# Altium PCB PCB robot V2.PCBDOC
Units mm, origin at the board's own origin, x right, y up, seen from the top; angles counter-clockwise.
Board outline 299.72 x 199.9 mm, 2 copper layers (Top Layer, Bottom Layer); 151 components, 120 nets, 545 pads, 15 vias.
Unrouted connection lines stored in the file: 272.
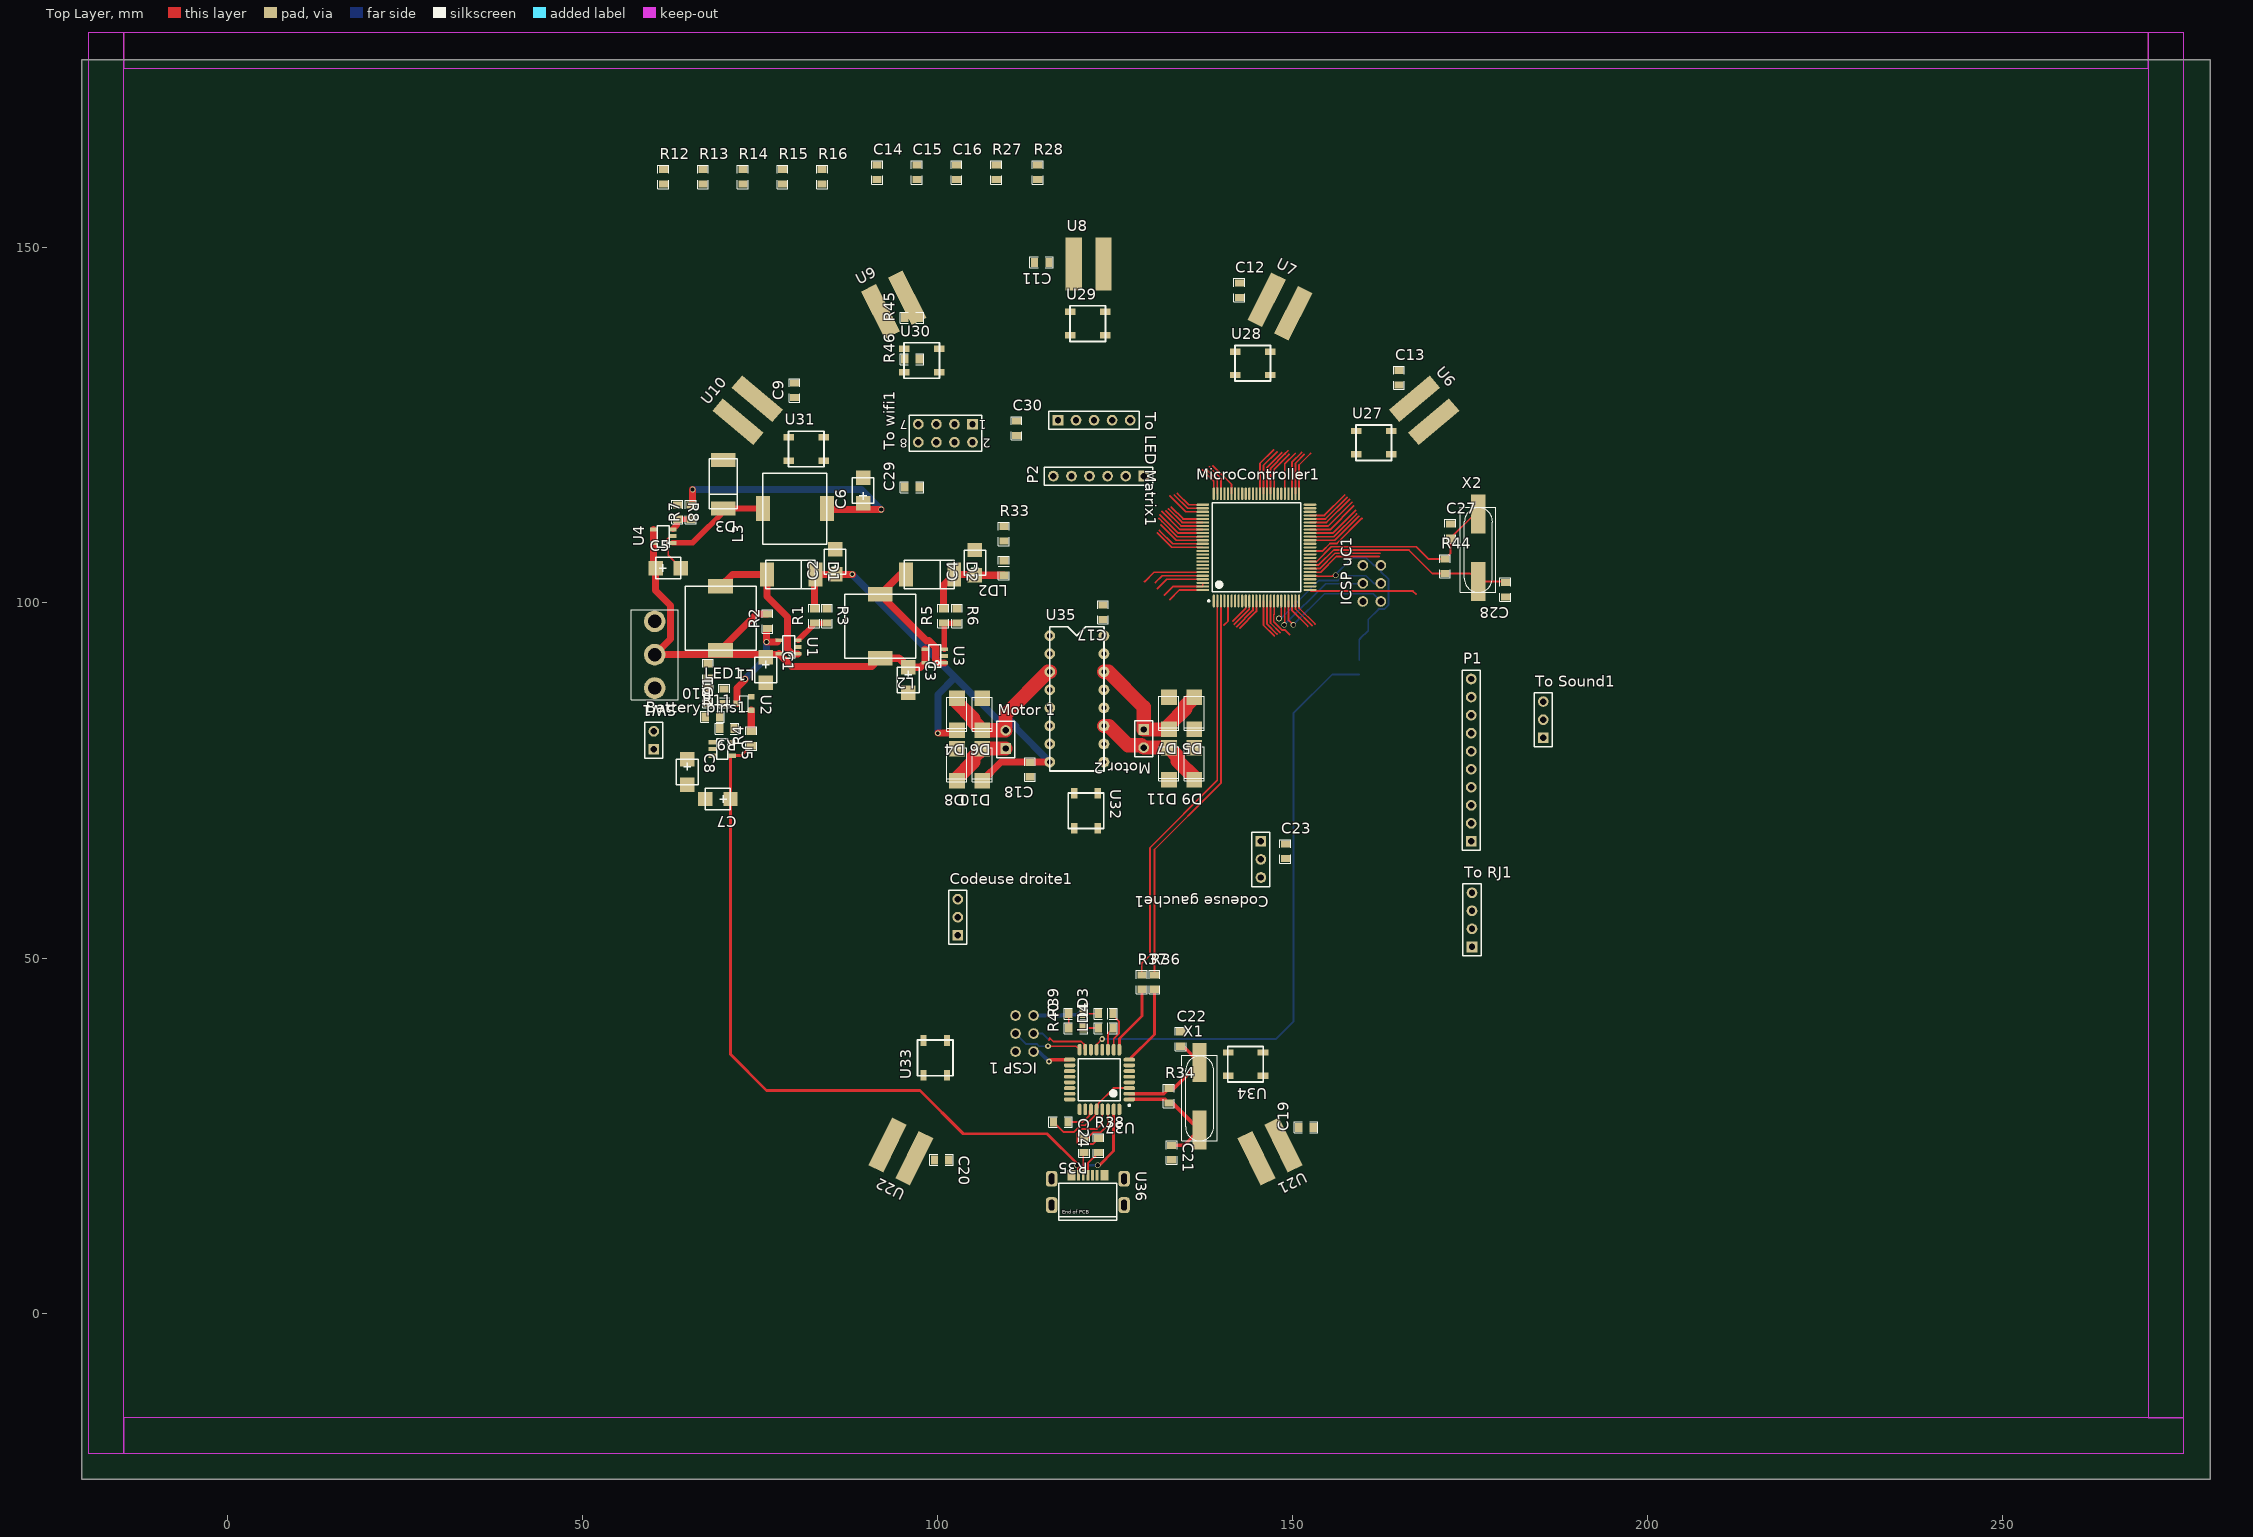
[diagram p0: Top Layer view]
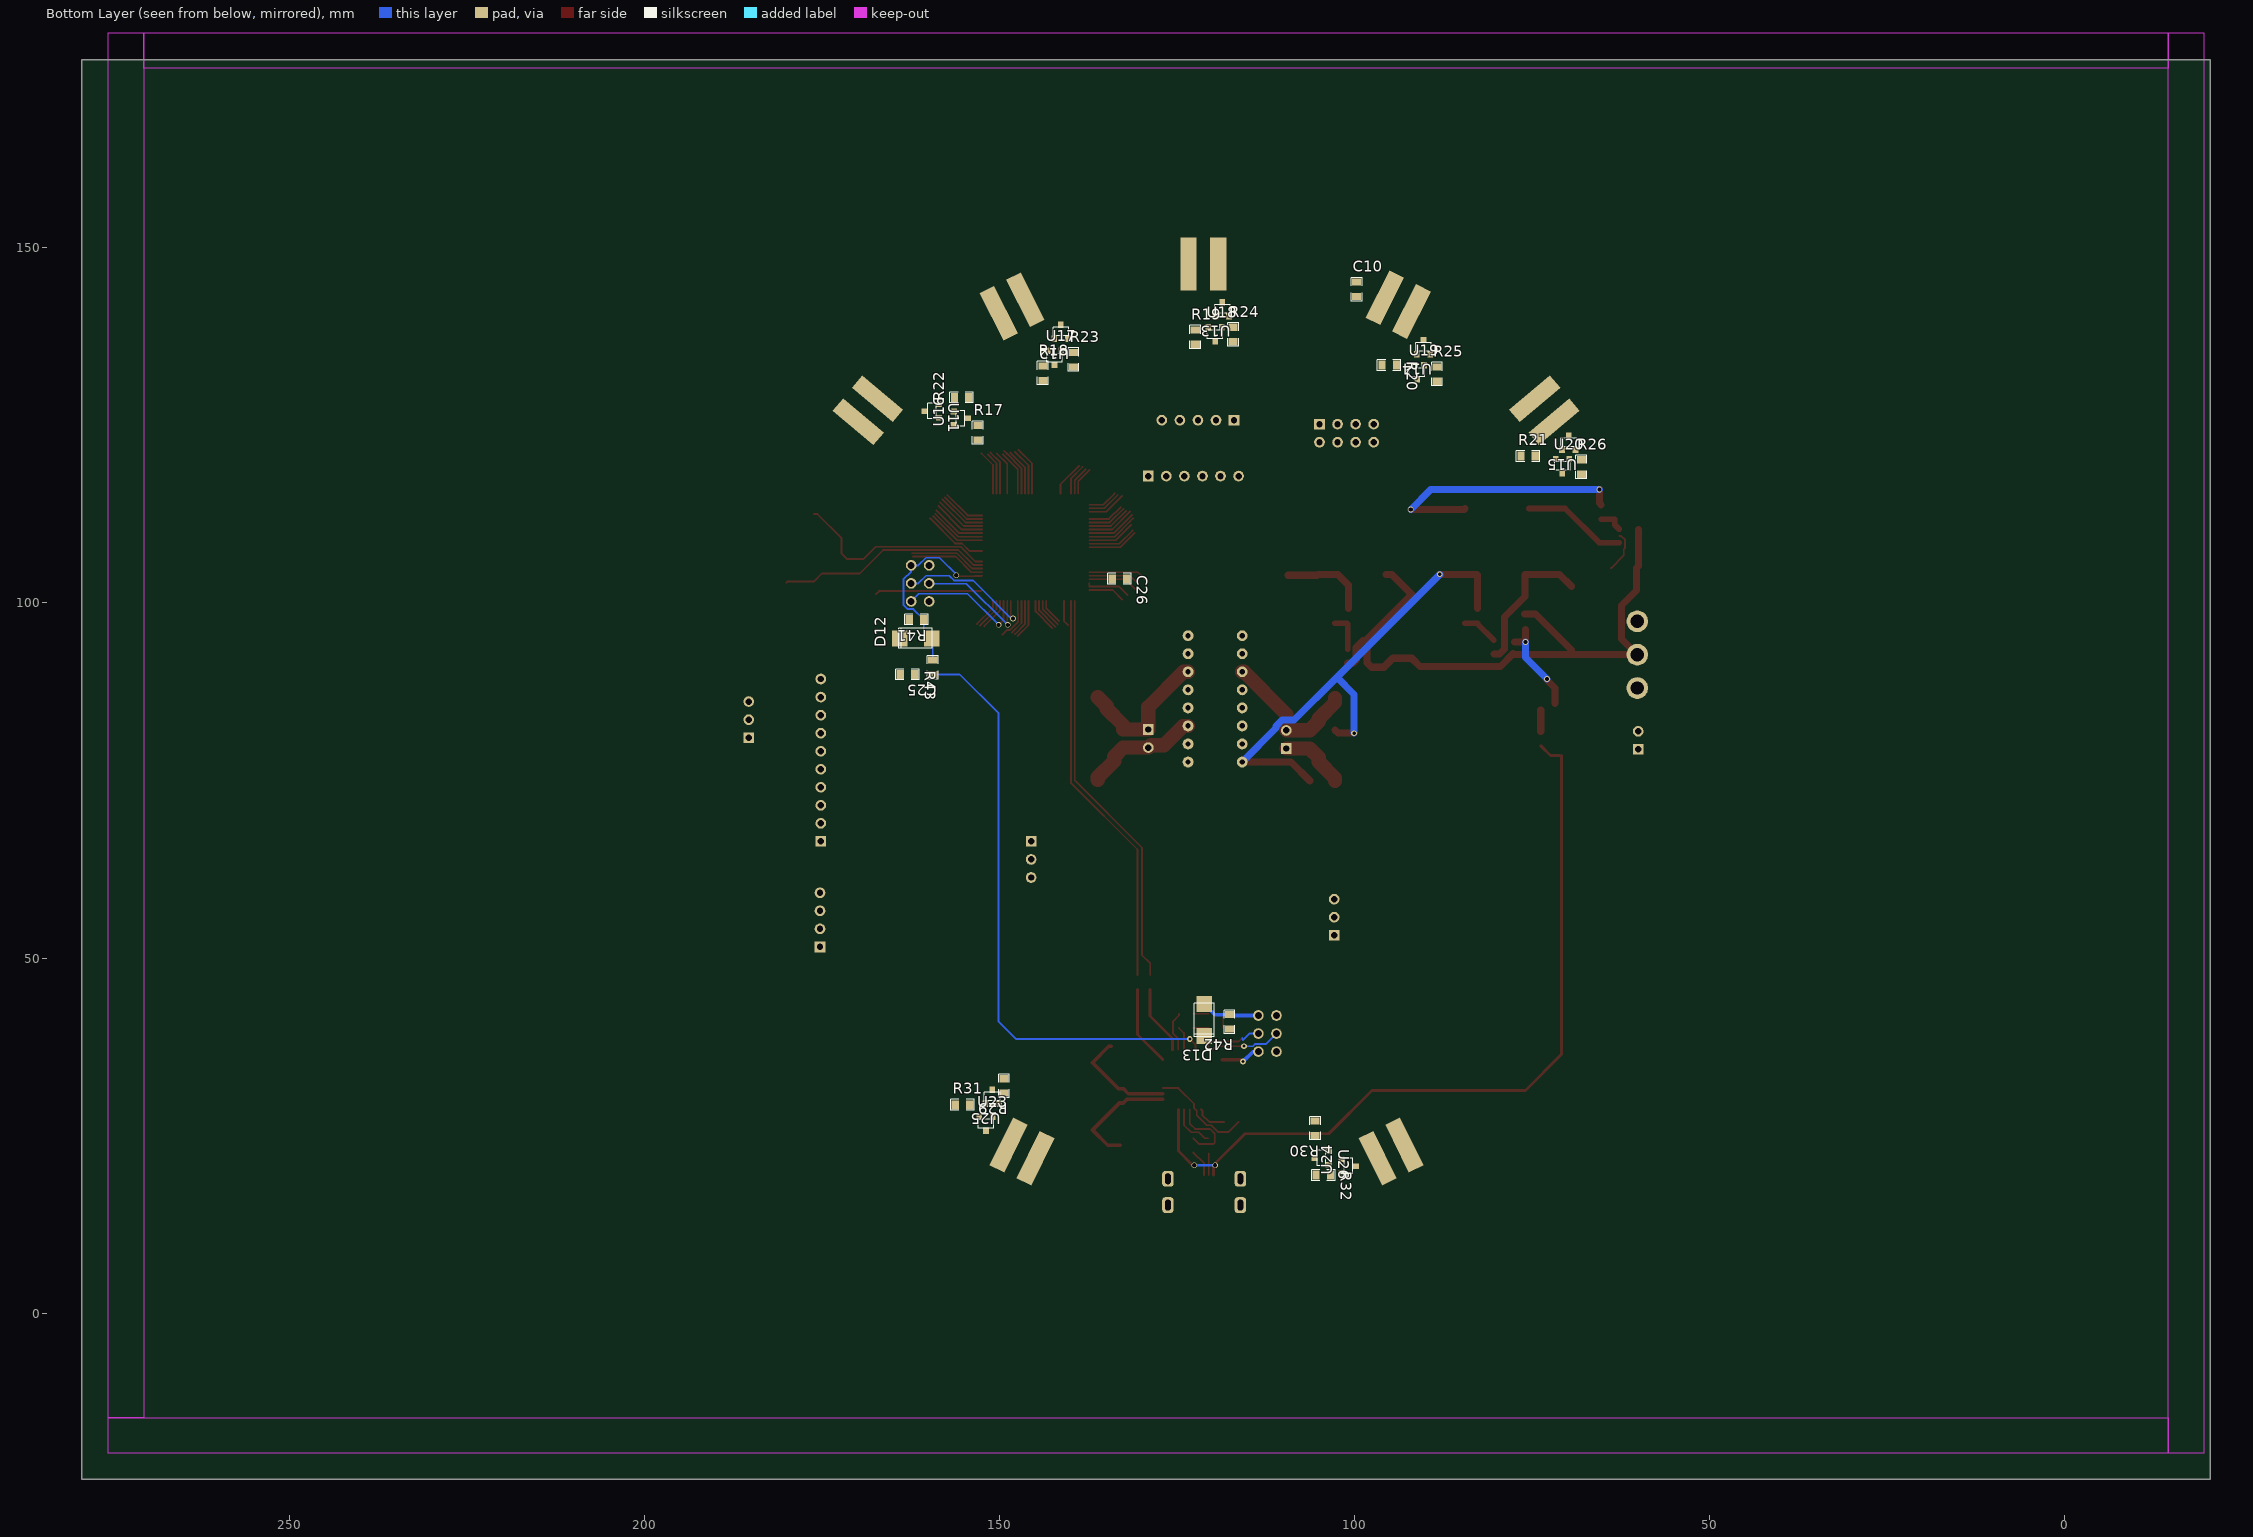
[diagram p1: Bottom Layer view, seen from below]

## Layer stack, top to bottom
Top Solder: solder mask 0.0102, Solder Resist, Dk 3.5
Top Layer: signal copper 0.0356
Dielectric1: dielectric 0.32, FR-4, Dk 4.8
Bottom Layer: signal copper 0.0356
Bottom Solder: solder mask 0.0102, Solder Resist, Dk 3.5

## Board outline
-20.497,-23.403 279.223,-23.403 279.223,176.495 -20.497,176.495

## Design rules (kind name [scope] priority, off if disabled: settings)
Clearance Clearance_bottom_polygon [OnLayer('Bottom Layer') Or OnLayer('Multi-Layer') vs OnLayer('Bottom Layer')  And  InPoly] p1: gap=0.508
Clearance Clearance_top_polygon [OnLayer('Top Layer')  Or OnLayer('Multi-Layer') vs OnLayer('Top Layer') And InPoly] p2: gap=0.508
Clearance Clearance_bottom [OnLayer('Bottom Layer') Or OnLayer('Multi-Layer') vs OnLayer('Bottom Layer')  And Not InPoly] p3: gap=0.203
Clearance Clearance_top [OnLayer('Top Layer')  Or OnLayer('Multi-Layer') vs OnLayer('Top Layer') And Not InPoly] p4: gap=0.203
Clearance Clearance_pad_to_pad [OnLayer('Multi-Layer') vs OnLayer('Multi-Layer')] p5: gap=0.254
ComponentClearance ComponentClearance_bottom [OnLayer('Bottom Overlay') vs OnLayer('Bottom Overlay')] p1: gap=0 collisioncheckmode=3 verticalgap=0.254 showdistances=FALSE
ComponentClearance ComponentClearance_top [OnLayer('Top Overlay') vs OnLayer('Top Overlay')] p2: gap=0 collisioncheckmode=3 verticalgap=0.254 showdistances=FALSE
FabricationTestPointUsage TestPointUsage [All] p1: valid=0 allowmultiple=FALSE
FabricationTestpoint Testpoint [All] p1: side=3 testpointundercomponent=TRUE minsize=1.016 maxsize=2.54 preferedsize=1.524 minholesize=0 maxholesize=1.016 preferedholesize=0.813 testpointgrid=0.025 allowsidetop=TRUE allowsidebottom=TRUE usegrid=TRUE gridtolerance=0
HoleSize [All] p1: absolutevalues=TRUE maxlimit=25.4 minlimit=0.406 maxpercent=80.000 minpercent=20.000
MinimumAnnularRing [PadXSize_AllLayers = PadYSize_AllLayers] p1: minimumring=0.203
PermittedLayers [All] p1: toplayerpermitted=TRUE bottomlayerpermitted=TRUE
PolygonConnect [All] p1: connectstyle=Relief reliefconductorwidth=0.61 reliefentries=4 polygonreliefangle="90 Angle" airgapwidth=0.254
RoutingVias [All] p1: holewidth=0.406 width=0.813 viastyle="Through Hole" minholewidth=0.4 minwidth=0.8 maxholewidth=0.6 maxwidth=10
SMDToPlane [All] p1: distance=0
SolderMaskExpansion [All] p1: expansion=0.102
ViasUnderSMD [All] p1: allowed=FALSE
Width Width_botom_top [OnLayer('Bottom Layer') or OnLayer('Top Layer')] p1: maxlimit=254 minlimit=0.254 preferedwidth=0.813 minimp=50.000000 maximp=50.000000 favimp=50.000000
25 further rules are at their usual default settings.

## Classes and differential pairs
component class "Wi fi connector": C29 R45 R46 "To wifi1"
component class CarteTxMoteur: C17 C18 "Codeuse droite1" "Codeuse gauche1" D4 D5 D6 D7 D8 D9 D10 D11 "Motor 1" "Motor 2" U35
component class "Schema chargeur USB projet robot": C7 C8 LD1 LED1 R9 R10 R11 U5
component class "Alim sch projet robot": "Battery pins1" C1 C2 C3 C4 C5 C6 D1 D2 D3 L1 L2 L3 R1 R2 R3 R4 R5 R6 R7 R8 "REG 5V" "REG 8V" SW1 U1 U2 U3 U4
component class "CarteTxCapteurDistance 2": Analog C9 C10 C11 C12 C13 C14 C15 C16 Digital infrared1 infrared2 infrared3 infrared4 infrared5 infrared6 LedRgbWs2812b1 LedRgbWs2812b2 LedRgbWs2812b3 LedRgbWs2812b4 LedRgbWs2812b5 LedRgbWs2812b6 LedRgbWs2812b7 LedRgbWs2812b8 LedRgbWs2812b9 LedRgbWs2812b10 Q1 Q2 Q3 Q4 Q5 Q6 Q7 Q8 Q9 Q10 Q11 R12 R13 R14 R15 R16 R17 R18 R19 R20 R21 R22 R23 R24 R25 R26 R27 R28 R29 R30 R31 R32 U6 U7 U8 U9 U10 U11 U12 U13 U14 U15 U16 U17 U18 U19 U20 U21 U22 U23 U24 U25 U26 U27 U28 U29 U30 U31 U32 U33 U34
component class "IA Core": C19 C20 C21 C22 C23 C24 C25 C26 C27 C28 D12 D13 "ICSP 1" "ICSP uC1" LD2 LD3 LD4 MicroController1 R33 R34 R35 R36 R37 R38 R39 R40 R41 R42 R43 R44 U36 U37 X1 X2
component class "LED Matrix connector": "To LED Matrix1"
component class "NXC Connector": "To RJ1"
component class "Sound Connector": "To Sound1"
component class TXRobot-Boutons: ButtonCo1 P1
component class "Line driver connector": C30 P2

## Components (designator, comment, footprint, x,y, rotation, side; value= is the part's Value field where it differs from the comment)
"Battery pins1" "Header 2" HDR1X2 60.071,79.375 r90 top
C1 "CAP_POL" 293D/B 75.819,92.329 r270 top
C2 "CAP_POL" 293D/B 85.598,104.013 r90 top
C3 "CAP_POL" 293D/B 95.885,90.932 r270 top
C4 "CAP_POL" 293D/B 105.283,103.886 r90 top
C5 "CAP_POL" 293D/B 60.325,104.902 r0 top
C6 "CAP_POL" 293D/B 89.535,114.046 r90 top
C7 "CAP_POL" 293D/B 70.866,72.39 r180 top
C8 "CAP_POL" 293D/B 64.77,77.978 r270 top
C9 "CAP" 0805 79.883,128.905 r90 top
C10 "CAP" 0805 99.695,143.129 r90 bottom
C11 "CAP" 0805 115.697,147.955 r180 top
C12 "CAP" 0805 142.494,143.002 r90 top
C13 "CAP" 0805 164.973,130.683 r90 top
C14 "CAP" 0805 91.517,159.604 r90 top
C15 "CAP" 0805 97.105,159.604 r90 top
C16 "CAP" 0805 102.693,159.604 r90 top
C17 "CAP" 0805 123.317,99.695 r270 top
C18 "CAP" 0805 113.03,77.549 r270 top
C19 "CAP" 0805 152.908,26.162 r180 top
C20 "CAP" 0805 99.568,21.59 r0 top
C21 "CAP" 0805 132.969,23.622 r270 top
C22 "CAP" 0805 134.239,37.592 r90 top
C23 "CAP" 0805 148.971,64.008 r90 top
C24 "CAP" 0805 116.332,26.924 r0 top
C25 "CAP" 0805 159.385,91.948 r270 bottom
C26 "CAP" 0805 134.112,103.378 r180 bottom
C27 "CAP" 0805 172.212,109.093 r90 top
C28 "CAP" 0805 179.959,102.87 r270 top
C29 "CAP" 0805 97.444,116.282 r180 top
C30 "CAP" 0805 111.125,123.571 r90 top
"Codeuse droite1" "Header 3" HDR1X3 102.87,53.213 r90 top
"Codeuse gauche1" "Header 3" HDR1X3 145.542,66.421 r270 top
D1 "SS32" "Schottly Diode SS32 footprint" 82.804,104.013 r270 top
D2 "SS32" "Schottly Diode SS32 footprint" 102.362,104.013 r270 top
D3 "SS32" "Schottly Diode SS32 footprint" 69.85,113.284 r180 top
D4 "DiodeRedresseuse" "Diode MULTICOMP SS16" 102.743,84.328 r270 top
D5 "DiodeRedresseuse" "Diode MULTICOMP SS16" 136.144,84.455 r270 top
D6 "DiodeRedresseuse" "Diode MULTICOMP SS16" 106.299,84.328 r270 top
D7 "DiodeRedresseuse" "Diode MULTICOMP SS16" 132.588,84.455 r270 top
D8 "DiodeRedresseuse" "Diode MULTICOMP SS16" 102.743,77.216 r270 top
D9 "DiodeRedresseuse" "Diode MULTICOMP SS16" 136.144,77.343 r270 top
D10 "DiodeRedresseuse" "Diode MULTICOMP SS16" 106.299,77.216 r270 top
D11 "DiodeRedresseuse" "Diode MULTICOMP SS16" 132.588,77.343 r270 top
D12 "DiodeRedresseuse" "Diode MULTICOMP SS16" 161.798,94.996 r0 bottom
D13 "DiodeRedresseuse" "Diode MULTICOMP SS16" 121.158,41.275 r270 bottom
"ICSP 1" "ISCP Arduino" "Prog Arduino" 113.538,36.83 r180 top
"ICSP uC1" "ISCP Arduino" "Prog Arduino" 162.433,100.203 r180 top
L1 "56uH" 1050 69.469,93.345 r180 top
L2 "56uH" 1050 91.948,92.202 r180 top
L3 "56uH" 1050 75.438,113.284 r90 top
LD1 "comment" LED0805 69.977,85.852 r90 top
LD2 "Yellow" LED0805 109.347,105.918 r270 top
LD3 "Yellow" LED0805 124.714,42.164 r180 top
LD4 "Yellow" LED0805 124.714,40.132 r180 top
LED1 "comment" LED0805 67.691,85.852 r90 top
MicroController1 "ATmega2560-16AU" 100A_N 144.907,107.823 r90 top
"Motor 1" "Header 2" HDR1X2 109.601,79.502 r90 top
"Motor 2" "Header 2" HDR1X2 129.032,82.169 r270 top
P1 "Header 10" HDR1X10 175.133,66.421 r90 top
P2 "Header 6" HDR1X6 129.032,117.856 r180 top
R1 "RES" 0805 82.677,97.155 r90 top
R2 "RES" 0805 76.073,96.393 r90 top
R3 "RES" 0805 84.455,99.187 r270 top
R4 "RES" 0805 73.787,79.883 r90 top
R5 "RES" 0805 100.838,97.155 r90 top
R6 "RES" 0805 102.743,99.187 r270 top
R7 "RES" 0805 65.278,111.76 r90 top
R8 "RES" 0805 63.373,113.792 r270 top
R9 "RES" 0805 71.374,82.296 r180 top
R10 "RES" 0805 67.691,91.44 r270 top
R11 "RES" 0805 67.31,83.947 r0 top
R12 "RES" 0805 61.418,158.969 r90 top
R13 "RES" 0805 67.006,158.969 r90 top
R14 "RES" 0805 72.594,158.969 r90 top
R15 "RES" 0805 78.182,158.969 r90 top
R16 "RES" 0805 83.77,158.969 r90 top
R17 "RES" 0805 153.035,122.936 r90 bottom
R18 "RES" 0805 143.891,131.318 r90 bottom
R19 "RES" 0805 122.428,136.398 r90 bottom
R20 "RES" 0805 96.139,133.477 r180 bottom
R21 "RES" 0805 76.581,120.65 r180 bottom
R22 "RES" 0805 154.305,128.905 r0 bottom
R23 "RES" 0805 139.573,133.223 r90 bottom
R24 "RES" 0805 117.094,136.779 r90 bottom
R25 "RES" 0805 88.392,131.191 r90 bottom
R26 "RES" 0805 68.072,118.11 r90 bottom
R27 "RES" 0805 108.281,159.604 r90 top
R28 "RES" 0805 114.123,159.604 r90 top
R29 "RES" 0805 149.352,33.02 r270 bottom
R30 "RES" 0805 105.537,27.051 r270 bottom
R31 "RES" 0805 156.21,29.337 r180 bottom
R32 "RES" 0805 105.41,19.431 r180 bottom
R33 "RES" 0805 109.347,108.712 r90 top
R34 "RES" 0805 132.588,29.591 r90 top
R35 "RES" 0805 120.65,24.638 r270 top
R36 "RES" 0805 130.556,45.593 r90 top
R37 "RES" 0805 128.778,45.593 r90 top
R38 "RES" 0805 122.682,22.606 r90 top
R39 "RES" 0805 120.523,42.164 r180 top
R40 "RES" 0805 120.523,40.132 r180 top
R41 "RES" 0805 160.655,97.663 r0 bottom
R42 "RES" 0805 117.602,42.037 r270 bottom
R43 "RES" 0805 163.957,89.916 r180 bottom
R44 "RES" 0805 171.45,104.14 r90 top
R45 "RES" 0805 97.444,140.158 r180 top
R46 "RES" 0805 97.444,134.316 r180 top
SW1 "SW_SPDT" RS734-7292 60.198,92.71 r180 top
"To LED Matrix1" "Header 5" HDR1X5 116.967,125.73 r0 top
"To RJ1" "Header 4" HDR1X4 175.26,51.562 r90 top
"To Sound1" "Header 3" HDR1X3 185.293,81.026 r90 top
"To wifi1" "Header 4X2" HDR2X4 104.937,125.172 r180 top
U1 "LM2731" "LM2731 footprint" 80.391,92.837 r270 top
U2 "Transistors" BC817-40 72.771,85.852 r270 top
U3 "LM2731" "LM2731 footprint" 100.965,91.567 r270 top
U4 "LMR10510XMF" "LMR10510 footprint" 62.738,108.458 r90 top
U5 "MCP73831" MCP73831 68.326,80.391 r270 top
U6 "infrared" Infrared 168.529,127.127 r310 top
U7 "infrared" Infrared 148.209,141.732 r333 top
U8 "infrared" Infrared 121.285,147.701 r0 top
U9 "infrared" Infrared 93.853,141.986 r27 top
U10 "infrared" Infrared 73.279,127.127 r50 top
U11 "Transistors" BC817-40 159.512,127 r270 bottom
U12 "Transistors" BC817-40 141.351,138.176 r0 bottom
U13 "Transistors" BC817-40 118.618,141.351 r0 bottom
U14 "Transistors" BC817-40 90.297,136.017 r0 bottom
U15 "Transistors" BC817-40 69.85,122.555 r0 bottom
U16 "Transistors" BC817-40 155.448,125.984 r90 bottom
U17 "Transistors" BC817-40 142.24,134.493 r180 bottom
U18 "Transistors" BC817-40 119.634,137.795 r180 bottom
U19 "Transistors" BC817-40 91.186,132.461 r180 bottom
U20 "Transistors" BC817-40 70.739,119.253 r180 bottom
U21 "infrared" Infrared 146.812,22.733 r206 top
U22 "infrared" Infrared 94.869,22.733 r154 top
U23 "Transistors" BC817-40 151.892,26.67 r180 bottom
U24 "Transistors" BC817-40 100.838,20.701 r90 bottom
U25 "Transistors" BC817-40 151.003,30.48 r0 bottom
U26 "Transistors" BC817-40 104.648,21.844 r270 bottom
U27 "LedRgbWs2812b" LedRgbWs2812b 161.417,122.555 r0 top
U28 "LedRgbWs2812b" LedRgbWs2812b 144.399,133.731 r0 top
U29 "LedRgbWs2812b" LedRgbWs2812b 121.158,139.319 r0 top
U30 "LedRgbWs2812b" LedRgbWs2812b 97.79,134.112 r0 top
U31 "LedRgbWs2812b" LedRgbWs2812b 81.534,121.666 r0 top
U32 "LedRgbWs2812b" LedRgbWs2812b 120.904,70.739 r270 top
U33 "LedRgbWs2812b" LedRgbWs2812b 99.695,35.941 r90 top
U34 "LedRgbWs2812b" LedRgbWs2812b 143.383,35.052 r180 top
U35 "L293NE" L293NE 123.444,95.377 r0 top
U36 "USB microB" "USB micro B connector" 116.078,18.923 r0 top
U37 "ATmega16U2-AU" 32A_N 122.809,32.893 r180 top
X1 "16MHz" HC-49S-SMD 136.906,25.781 r90 top
X2 "16MHz" HC-49S-SMD 176.149,102.997 r90 top

## Footprints (in the part's own frame and the unit in brackets; to place one, negate y for a bottom-side part, rotate by r counter-clockwise, add the part's x,y. Pads: shape width x height; smd on the part's side, far side on the other; paste and mask are expansions set on the pad)
32A_N [mm] "Thin QFP, 32-Leads, Body 7x7mm, Pitch 0.8mm, IPC Medium Density"
  oval 1.65x0.55 smd: 1(-4.2,2.8) 2(-4.2,2) 3(-4.2,1.2) 4(-4.2,0.4) 5(-4.2,-0.4) 6(-4.2,-1.2) 7(-4.2,-2) 8(-4.2,-2.8) 17(4.2,-2.8) 18(4.2,-2) 19(4.2,-1.2) 20(4.2,-0.4) 21(4.2,0.4) 22(4.2,1.2) 23(4.2,2) 24(4.2,2.8)
  oval 0.55x1.65 smd: 9(-2.8,-4.2) 10(-2,-4.2) 11(-1.2,-4.2) 12(-0.4,-4.2) 13(0.4,-4.2) 14(1.2,-4.2) 15(2,-4.2) 16(2.8,-4.2) 25(2.8,4.2) 26(2,4.2) 27(1.2,4.2) 28(0.4,4.2) 29(-0.4,4.2) 30(-1.2,4.2) 31(-2,4.2) 32(-2.8,4.2)
  silkscreen extent -4.33,-2.95 2.95,3.75, body extent -3.5,-3.5 3.5,3.5, height 1.2
100A_N [mm] "Thin QFP, 100-Leads, Body 14x14mm, Pitch 0.5mm, IPC Medium Density"
  oval 1.8x0.3 smd: 1(-7.55,6) 2(-7.55,5.5) 3(-7.55,5) 4(-7.55,4.5) 5(-7.55,4) 6(-7.55,3.5) 7(-7.55,3) 8(-7.55,2.5) 9(-7.55,2) 10(-7.55,1.5) 11(-7.55,1) 12(-7.55,0.5) 13(-7.55,0) 14(-7.55,-0.5) 15(-7.55,-1) 16(-7.55,-1.5) 17(-7.55,-2) 18(-7.55,-2.5) 19(-7.55,-3) 20(-7.55,-3.5) 21(-7.55,-4) 22(-7.55,-4.5) 23(-7.55,-5) 24(-7.55,-5.5) 25(-7.55,-6) 51(7.55,-6) 52(7.55,-5.5) 53(7.55,-5) 54(7.55,-4.5) 55(7.55,-4) 56(7.55,-3.5) 57(7.55,-3) 58(7.55,-2.5) 59(7.55,-2) 60(7.55,-1.5) 61(7.55,-1) 62(7.55,-0.5) 63(7.55,0) 64(7.55,0.5) 65(7.55,1) 66(7.55,1.5) 67(7.55,2) 68(7.55,2.5) 69(7.55,3) 70(7.55,3.5) 71(7.55,4) 72(7.55,4.5) 73(7.55,5) 74(7.55,5.5) 75(7.55,6)
  oval 0.3x1.8 smd: 26(-6,-7.55) 27(-5.5,-7.55) 28(-5,-7.55) 29(-4.5,-7.55) 30(-4,-7.55) 31(-3.5,-7.55) 32(-3,-7.55) 33(-2.5,-7.55) 34(-2,-7.55) 35(-1.5,-7.55) 36(-1,-7.55) 37(-0.5,-7.55) 38(0,-7.55) 39(0.5,-7.55) 40(1,-7.55) 41(1.5,-7.55) 42(2,-7.55) 43(2.5,-7.55) 44(3,-7.55) 45(3.5,-7.55) 46(4,-7.55) 47(4.5,-7.55) 48(5,-7.55) 49(5.5,-7.55) 50(6,-7.55) 76(6,7.55) 77(5.5,7.55) 78(5,7.55) 79(4.5,7.55) 80(4,7.55) 81(3.5,7.55) 82(3,7.55) 83(2.5,7.55) 84(2,7.55) 85(1.5,7.55) 86(1,7.55) 87(0.5,7.55) 88(0,7.55) 89(-0.5,7.55) 90(-1,7.55) 91(-1.5,7.55) 92(-2,7.55) 93(-2.5,7.55) 94(-3,7.55) 95(-3.5,7.55) 96(-4,7.55) 97(-4.5,7.55) 98(-5,7.55) 99(-5.5,7.55) 100(-6,7.55)
  silkscreen extent -7.67,-6.25 6.25,6.82, body extent -7,-7 7,7, height 1.2
293D/B [mil]
  rect 80x80 smd: 1(0,0) 2(140,0)
  silkscreen extent 0,-60 140,60
0805 [mil]
  rect 40x50 smd: 1(0,0) 2(80,0)
  silkscreen extent -25,-30 105,30
1050 [mm]
  rect 3.5x2 smd paste+0 mask+1: 1(0,0) 2(0,-9)
  silkscreen extent -5,-9 5,0
BC817-40 [mm]
  rect 0.8x0.9 smd: 1(0.95,1) 2(-0.95,1) 3(0,-1)
  silkscreen extent -1.1,-0.6 1.1,0.6
"Diode MULTICOMP SS16" [mm]
  rect 2.2x2.21 smd: 1(-2.25,0) 2(2.25,0)
  silkscreen extent -2.38,-1.4 2.38,1.4
HC-49S-SMD [mm] "SMD quartz crystal"
  rect 5.5x2 smd: 1(0,0) 2(9.5,0)
  silkscreen extent -1.5,-2.48 10.5,2.52
HDR1X2 [mm] "Connector; Header; 2 Position"
  rect 1.5x1.5 hole 0.9: 1(0,0)
  round 1.5 hole 0.9: 2(2.54,0)
  silkscreen extent -1.27,-1.27 3.81,1.27
HDR1X3 [mm] "Connector; Header; 3 Position"
  rect 1.5x1.5 hole 0.9: 1(0,0)
  round 1.5 hole 0.9: 2(2.54,0) 3(5.08,0)
  silkscreen extent -1.27,-1.27 6.35,1.27
HDR1X4 [mm] "Connector; Header; 4 Position"
  rect 1.5x1.5 hole 0.9: 1(0,0)
  round 1.5 hole 0.9: 2(2.54,0) 3(5.08,0) 4(7.62,0)
  silkscreen extent -1.27,-1.27 8.89,1.27
HDR1X5 [mm] "Connector; Header; 5 Position"
  rect 1.5x1.5 hole 0.9: 1(0,0)
  round 1.5 hole 0.9: 2(2.54,0) 3(5.08,0) 4(7.62,0) 5(10.16,0)
  silkscreen extent -1.27,-1.27 11.43,1.27
HDR1X6 [mm] "Connector; Header; 6 Position"
  rect 1.5x1.5 hole 0.9: 1(0,0)
  round 1.5 hole 0.9: 2(2.54,0) 3(5.08,0) 4(7.62,0) 5(10.16,0) 6(12.7,0)
  silkscreen extent -1.27,-1.27 13.97,1.27
HDR1X10 [mm] "Connector; Header; 10 Position"
  rect 1.5x1.5 hole 0.9: 1(0,0)
  round 1.5 hole 0.9: 2(2.54,0) 3(5.08,0) 4(7.62,0) 5(10.16,0) 6(12.7,0) 7(15.24,0) 8(17.78,0) 9(20.32,0) 10(22.86,0)
  silkscreen extent -1.27,-1.27 24.13,1.27
HDR2X4 [mm] "Connector; Header; 4x2 Position"
  rect 1.5x1.5 hole 0.9: 1(0,0)
  round 1.5 hole 0.9: 2(0,2.54) 3(2.54,0) 4(2.54,2.54) 5(5.08,0) 6(5.08,2.54) 7(7.62,0) 8(7.62,2.54)
  silkscreen extent -1.27,-1.27 8.89,3.81
Infrared [mm]
  rect 2.3x7.5 smd far side: gndEmitter(-2.1,0) VCC(2.1,0)
  rect 2.3x7.5 smd: gndReceiver(2.1,0) VCC(-2.1,0)
L293NE [mil]
  round 60 hole 30: 1(-300,0) 2(-300,-100) 3(-300,-200) 4(-300,-300) 5(-300,-400) 6(-300,-500) 7(-300,-600) 8(-300,-700) 9(0,0) 10(0,-100) 11(0,-200) 12(0,-300) 13(0,-400) 14(0,-500) 15(0,-600) 16(0,-700)
  silkscreen extent -300,-750 0,50
LED0805 [mil]
  rect 40x50 smd: A(80,0) K(0,0)
  silkscreen extent -25,-30 105,30
LedRgbWs2812b [mm]
  rect 1.5x0.9 smd: din(2.45,1.65) dout(-2.45,-1.65) GND(2.45,-1.65) VCC(-2.45,1.65)
  silkscreen extent -2.5,-2.5 2.5,2.5
"LM2731 footprint" [mm]
  rect 0.55x1 smd paste+0 mask+0.05: 1(0,0) 2(-0.95,0) 3(-1.9,0) 4(-1.9,-2.7) 5(0,-2.7)
  silkscreen extent -2.54,-2.16 0.64,-0.51
"LMR10510 footprint" [mm]
  rect 0.55x1 smd paste+0 mask+0.05: 1(0,0) 2(0.95,0) 3(1.9,0) 4(1.9,2.7) 5(0,2.7)
  silkscreen extent -0.64,0.51 2.41,2.16
MCP73831 [mm]
  rect 0.6x1.1 smd paste+0 mask+0.05: 1(0,0) 2(0.95,0) 3(1.9,0) 4(1.9,2.8) 5(0,2.8)
  silkscreen extent -0.51,0.63 2.41,2.16
"Prog Arduino" [mm]
  round 1.5 hole 1 paste+0 mask+0.05: 1(0,0) 2(2.54,0) 3(0,-2.54) 4(2.54,-2.54) 5(0,-5.08) 6(2.54,-5.08)
RS734-7292 [mil]
  round 120 hole 73: 1(0,0) 2(0,185) 3(0,-185)
  silkscreen extent -130,-250 130,250
"Schottly Diode SS32 footprint" [mm]
  rect 3.39x1.96 smd paste+0 mask+0.05: 1(0,0) 2(0,-6.81)
  silkscreen extent -2,-7 2,0
"USB micro B connector" [mm]
  rect 0.4x1.5 smd paste+0 mask+0.05: 1(3.8,0.508) 2(4.45,0.508) 3(5.1,0.508) 4(5.75,0.508) 5(6.4,0.508)
  rrect50% 1.6x2.2 hole 0.8 slot 1.5 at 90 deg paste+0 mask+0.05: 6(0,0) 7(0,-3.7) 8(10.2,-3.7) 9(10.2,0)
  rect 1.15x1.5 smd paste+0 mask+0.05: 10(2.775,0.508) 11(7.425,0.508)
  silkscreen extent 1.02,-5.84 9.14,-0.64

## Part data
"Battery pins1" "Motor 1" "Motor 2": "Header, 2-Pin"
C1 C2 C3 C4 C5 C6 C7 C8: "capacité polarisée"
C9 C10 C11 C12 C13 C14 C15 C16 C17 C18 C19 C20 C21 C22 C23 C24 C25 C26 C27 C28 C29 C30: "capacité non polarisée"
"Codeuse droite1" "Codeuse gauche1" "To Sound1": "Header, 3-Pin"
D1 D2 D3: "Schottky Diode 20V 3A"
"ICSP 1" "ICSP uC1": "Programmation Port For Arduino"
L1 L2 L3: library part "Shielded inductor", "Shielded Inductor 1050"
LD1 LD2 LD3 LD4 LED1: library part LED, "LED 5mm/3mm/CMS"
MicroController1: "8-bit AVR Microcontroller, 4.5-5.5V, 256KB Flash, 4KB EEPROM, 8KB SRAM, 86 GPIO pins, 100-pin TQFP, Industrial Grade (-40°C to 85°C), Pb-Free"
P1: "Header, 10-Pin"
P2: "Header, 6-Pin"
R1 R2 R3 R4 R5 R6 R7 R8 R9 R10 R11 R12 R13 R14 R15 R16 R17 R18 R19 R20 R21 R22 R23 R24 R25 R26 R27 R28 R29 R30 R31 R32 R33 R34 R35 R36 R37 R38 R39 R40 R41 R42 R43 R44 R45 R46: "resistance"
"To LED Matrix1": "Header, 5-Pin"
"To RJ1": "Header, 4-Pin"
"To wifi1": "Header, 4-Pin, Dual row"
U1 U3: "Boost switch regulator DCDC"
U2 U11 U12 U13 U14 U15 U16 U17 U18 U19 U20 U23 U24 U25 U26: "NPN transistor"
U4: "Step down converter"
U5: "Voltage regulator for Li-po or li-ion battery, USB compatible"
U6 U7 U8 U9 U10 U21 U22: library part RPR-359F
U36: "Usb female connector SMD micro B"
U37: "8-bit AVR Microcontroller, 2.7-5.5V, 16KB Flash, 512 Bytes EEPROM, 512 Bytes SRAM, 32-pin TQFP, Industrial Grade (-40°C to 85°C)"
X1 X2: library part XTAL, "Quartz"

## Via types
v1: diameter 0.8, hole 0.6, Top Layer to Bottom Layer, 10 vias
v2: diameter 0.813, hole 0.406, Top Layer to Bottom Layer, 3 vias
v3: diameter 0.8, hole 0.5, Top Layer to Bottom Layer, 2 vias

## Nets (pads, with @x,y where several pads share a name; then routed paths per layer and width w, separated by ;. In a path a pad name is that pad's centre, name@x,y a point inside that pad or via, vN(x,y) a via of type N, cw(c..) or ccw(c..) an arc to the next point about the centre after c; other vN are vias at no path point)
BATTERY: C1.1 C3.1 C5.1 C8.1 L1.1 L2.1 R2.2 SW1.1 U1.5 U3.4 U3.5 U4.4 U4.5 U5.3 | length 70.3
  Top Layer w1: U4.4 U4.5 60.038,105.189 C5.1 60.325,101.736 62.425,99.636 62.425,94.937 SW1.1 77.564,92.71 U1.5 79.469,91.059 90.805,91.059 L2.1 94.615,92.202 C3.1 97.63,90.932 U3.5 U3.4 ; L1.1 74.549,98.425 R2.2
"BATTERY PIN +": "Battery pins1.2" SW1.2
D+: R38.1 U36.3 | length 3.8
  Top Layer w0.254: U36.3 121.178,21.102 R38.1
D-: R35.2 U36.2 | length 3.1
  Top Layer w0.254: U36.2 R35.2@120.528,22.484
DTR: C25.2 R43.2 U37.13 | length 84.7
  Top Layer w0.254: U37.13 122.409,37.827 v2(123.19,38.608)
  Bottom Layer w0.254: v2(123.19,38.608) 147.701,38.608 150.114,41.021 150.114,84.455 155.575,89.916 C25.2
"ENABLE 1": MicroController1.23 U35.1 | length 4.6
  Top Layer w0.254: MicroController1.23 149.907,98.99 152.146,96.751 152.146,96.647
"ENABLE 2": MicroController1.5 U35.16 | length 3.6
  Top Layer w0.254: 140.364,96.901 140.907,97.444 MicroController1.5
GND: "Battery pins1.1" "Codeuse droite1.2" "Codeuse gauche1.2" "ICSP 1.6" "ICSP uC1.6" "To LED Matrix1.2" "To RJ1.1" "To Sound1.1" "To wifi1.2" C1.2 C2.2 C3.2 C4.2 C5.2 C6.2 C7.2 C8.2 C9.2 C10.2 C11.2 C12.2 C13.2 C14.2 C15.2 C16.2 C17.1 C18.2 C19.1 C20.2 C21.2 C22.2 C23.1 C24.1 C26.2 C27.2 C28.2 C29.2 C30.1 D3.2 D6.1 D7.1 D8.1 D9.1 MicroController1.11 MicroController1.32 MicroController1.62 MicroController1.81 MicroController1.98 MicroController1.99 P1.3 P1.5 P1.7 P2.1 R3.1 R6.1 R8.1 R9.2 R11.2 R12.2 R13.2 R14.2 R15.2 R16.2 R22.1 R23.1 R24.1 R25.1 R26.1 R27.2 R28.2 R31.1 R32.1 R33.2 R43.1 R46.2 U1.2 U2.2 U3.2 U4.2 U5.2 U16.2 U17.2 U18.2 U19.2 U20.2 U25.2 U26.2 U27.GND U28.GND U29.GND U30.GND U31.GND U32.GND U33.GND U34.GND U35.4 U35.5 U35.12 U35.13 U36.5 U36.6 U36.7 U36.8 U36.9 U36.10 U36.11 U37.3 U37.28 | length 54.3
  Top Layer w0.254: U4.2 62.446,109.408 61.908,108.87 61.908,107.728 62.103,107.533 62.103,106.68 C5.2 ; C24.1 117.729,25.527 119.243,25.527 120.183,26.467 120.789,26.467 122.214,27.892 122.214,28.498 U37.28 122.604,28.888 122.604,29.494 124.803,31.693 U37.3 ; 131.953,101.092 133.184,102.323 MicroController1.99 MicroController1.98 ; 132.536,113.232 134.445,111.323 MicroController1.81 ; 141.79,96.97 143.907,99.088 MicroController1.11 ; MicroController1.62 145.407,119.626 147.32,121.539 ; MicroController1.32 153.814,104.823 155.976,106.985 162.306,106.985
MISO: "ICSP uC1.1" MicroController1.22 | length 18.2
  Top Layer w0.254: MicroController1.22 149.407,97.608 v1(150.114,96.901)
  Bottom Layer w0.254: v1(150.114,96.901) 154.496,101.283 161.353,101.283 162.433,100.203
"MISO 16": "ICSP 1.1" U37.17 | length 5.8
  Top Layer w0.5: v2(115.697,35.433) 115.957,35.693 U37.17
  Bottom Layer w0.5: 113.538,36.83 114.3,36.83 v2(115.697,35.433)
MOSI: "ICSP uC1.4" MicroController1.21 | length 16.9
  Top Layer w0.254: v1(148.844,96.901) 148.887,96.944 148.887,100.253 MicroController1.21
  Bottom Layer w0.254: v1(148.844,96.901) 154.642,102.699 159.849,102.699 159.893,102.743
"MOSI 16": "ICSP 1.4" U37.16 | length 10
  Top Layer w0.254: v2(115.57,37.592) 119.51,37.592 U37.16
  Bottom Layer w0.254: 110.998,39.37 112.458,37.91 113.985,37.91 114.304,37.592 v2(115.57,37.592)
"MOTOR1 IN 1": MicroController1.18 U35.2 | length 6
  Top Layer w0.254: MicroController1.18 147.407,98.385 147.352,98.33 147.352,97.361 148.542,96.171 148.939,96.171 149.606,95.504
"MOTOR1 IN 2": MicroController1.17 U35.7 | length 5
  Top Layer w0.254: MicroController1.17 146.907,98.532 146.895,98.519 146.895,97.171 148.258,95.807
"MOTOR1 OUT+": "Motor 1.2" D4.1 D6.2 U35.3 | length 20.2
  Top Layer w2: D4.1 102.743,85.985 105.051,83.676 105.051,83.326 D6.2 109.565,82.078 109.565,84.277 115.585,90.297 U35.3
"MOTOR1 OUT-": "Motor 1.1" D8.2 D10.1 U35.6 | length 9.3
  Top Layer w2: D8.2 102.743,75.317 105.051,77.625 105.051,78.218 D10.1 106.335,79.502 109.601,79.502
"MOTOR2 IN1": MicroController1.16 U35.10 | length 5.2
  Top Layer w0.254: MicroController1.16 146.407,97.012 147.808,95.611
"MOTOR2 IN2": MicroController1.15 U35.15 | length 5.5
  Top Layer w0.254: MicroController1.15 145.907,96.866 147.421,95.351
"MOTOR2 OUT+": "Motor 2.1" D5.1 D7.2 U35.11 | length 20.4
  Top Layer w2: U35.11 124.079,90.297 129.032,85.344 129.032,82.169 132.552,82.169 D7.2 132.588,82.798 134.896,85.107 134.896,85.457 D5.1
"MOTOR2 OUT-": "Motor 2.2" D9.2 D11.1 U35.14 | length 15.9
  Top Layer w2: U35.14 124.118,82.677 126.829,79.966 128.695,79.966 ; 129.032,79.629 132.552,79.629 D11.1 133.836,78.345 133.836,77.752 136.144,75.444 D9.2
NetC21_1: C21.1 R34.1 U37.1 X1.1 | length 16.5
  Top Layer w0.5: U37.1 132.086,30.093 R34.1 133.096,29.591 X1.1 134.747,23.622 C21.1
NetC22_1: C22.1 R34.2 U37.2 X1.2 | length 15.3
  Top Layer w0.5: U37.2 131.858,30.893 R34.2 133.248,31.623 X1.2 134.595,37.592 C22.1
NetC24_2: C24.2 U37.27 | length 4.3
  Top Layer w0.254: C24.2 120.446,26.924 121.414,27.892 121.414,28.498 U37.27
NetC27_1: C27.1 MicroController1.34 R44.2 X2.2 | length 29.2
  Top Layer w0.254: MicroController1.34 153.386,105.823 155.462,107.899 167.437,107.899 169.164,106.172 R44.2 172.212,106.934 C27.1 175.616,112.497 X2.2
NetC28_1: C28.1 MicroController1.33 R44.1 X2.1 | length 30.3
  Top Layer w0.254: MicroController1.33 152.477,105.343 153.687,105.343 155.786,107.442 166.37,107.442 169.672,104.14 R44.1 175.006,104.14 X2.1 179.832,102.997 C28.1
"NetCodeuse droite1_3": "Codeuse droite1.3" MicroController1.45 | length 6.9
  Top Layer w0.254: MicroController1.45 154.78,111.323 158,114.542
"NetCodeuse gauche1_3": "Codeuse gauche1.3" MicroController1.46 | length 6.5
  Top Layer w0.254: MicroController1.46 154.634,111.823 157.676,114.866
NetD1_2: D1.2 L1.2 U1.1 | length 20.7
  Top Layer w1: L1.2 71.137,104.013 D1.2 75.994,100.895 78.894,97.995 78.894,93.514 79.6,92.809 U1.1@80.391,92.809
NetD2_2: D2.2 L2.2 U3.1 | length 18.8
  Top Layer w1: D2.2 94.759,104.013 L2.2 98.48,94.67 98.831,94.67 99.762,93.74 99.762,91.951 100.174,91.539 U3.1@100.965,91.539
NetD3_1: D3.1 L3.1 U4.1 | length 14.7
  Top Layer w0.8: U4.1 65.532,108.458 70.358,113.284 L3.1
NetLD1_K: LD1.K R10.1
NetLD2_K: LD2.K R33.1
NetLD3_A: LD3.A R39.1 | length 2.2
  Top Layer w0.254: R39.1 LD3.A
NetLD3_K: LD3.K U37.10 | length 5.7
  Top Layer w0.254: LD3.K 124.714,41.935 125.552,41.097 125.552,39.36 124.809,38.617 U37.10
NetLD4_A: LD4.A R40.1 | length 2.2
  Top Layer w0.254: R40.1 LD4.A
NetLD4_K: LD4.K U37.11 | length 3.3
  Top Layer w0.254: U37.11 124.009,39.427 LD4.K
NetLED1_A: LED1.A R10.2 U5.1
NetLED1_K: LED1.K R11.1
NetMicroController1_12: "To wifi1.1" MicroController1.12 | length 4.6
  Top Layer w0.254: 142.113,96.647 144.407,98.941 MicroController1.12
NetMicroController1_13: MicroController1.13 R45.1 | length 4.8
  Top Layer w0.254: 142.563,96.451 144.907,98.794 MicroController1.13
NetMicroController1_24: "To Sound1.2" MicroController1.24 | length 4.5
  Top Layer w0.254: MicroController1.24 150.407,99.136 152.775,96.768
NetMicroController1_25: MicroController1.25 U27.din | length 4.2
  Top Layer w0.254: MicroController1.25 150.907,99.283 153.162,97.028
NetMicroController1_26: MicroController1.26 P1.9 | length 15.2
  Top Layer w0.254: MicroController1.26 152.617,101.663 166.942,101.663 167.386,101.219
NetMicroController1_35: MicroController1.35 R30.1
NetMicroController1_37: MicroController1.37 R29.1 | length 9.2
  Top Layer w0.254: MicroController1.37 154.24,107.323 155.273,108.356 156.235,108.356 159.766,111.887
NetMicroController1_40: MicroController1.40 U32.din | length 8.3
  Top Layer w0.254: MicroController1.40 155.963,108.823 159.333,112.193
NetMicroController1_41: MicroController1.41 R21.1 | length 7.9
  Top Layer w0.254: MicroController1.41 155.817,109.323 159.01,112.516
NetMicroController1_42: MicroController1.42 P2.3 | length 7.7
  Top Layer w0.254: MicroController1.42 155.67,109.823 158.877,113.03
NetMicroController1_43: "To RJ1.2" MicroController1.43 | length 7.6
  Top Layer w0.254: MicroController1.43 155.281,110.323 158.623,113.665
NetMicroController1_44: "To RJ1.3" MicroController1.44 | length 7.3
  Top Layer w0.254: MicroController1.44 155.019,110.823 158.369,114.173
NetMicroController1_51: MicroController1.51 R20.1 | length 6.3
  Top Layer w0.254: MicroController1.51 150.907,119.411 152.527,121.031
NetMicroController1_52: MicroController1.52 P2.5 | length 6
  Top Layer w0.254: MicroController1.52 150.407,119.661 151.644,120.898
NetMicroController1_53: MicroController1.53 R17.1 | length 6.3
  Top Layer w0.254: MicroController1.53 149.907,119.808 151.257,121.158
NetMicroController1_55: MicroController1.55 R18.1 | length 6.3
  Top Layer w0.254: MicroController1.55 148.907,119.57 150.368,121.031
NetMicroController1_58: "To LED Matrix1.5" MicroController1.58 | length 6.4
  Top Layer w0.254: MicroController1.58 147.407,118.809 149.377,120.779 149.377,120.791 149.485,120.898
NetMicroController1_59: "To LED Matrix1.4" MicroController1.59 | length 7.1
  Top Layer w0.254: MicroController1.59 146.907,118.955 148.92,120.969 148.92,120.98 149.352,121.412
NetMicroController1_60: "To LED Matrix1.3" MicroController1.60 | length 6.6
  Top Layer w0.254: MicroController1.60 146.407,119.102 148.463,121.158
NetMicroController1_70: MicroController1.70 R19.1 | length 5
  Top Layer w0.254: 138.817,119.259 141.407,116.669 MicroController1.70
NetMicroController1_74: MicroController1.74 P1.2 | length 4.1
  Top Layer w0.254: 137.864,118.814 139.407,117.272 MicroController1.74
NetMicroController1_75: MicroController1.75 P1.4 | length 4
  Top Layer w0.254: 137.287,118.745 138.907,117.125 MicroController1.75
NetMicroController1_76: MicroController1.76 P1.6 | length 4.2
  Top Layer w0.254: 133.8,115.385 135.363,113.823 MicroController1.76
NetMicroController1_77: MicroController1.77 P1.8 | length 4.8
  Top Layer w0.254: 133.35,115.189 135.216,113.323 MicroController1.77
NetMicroController1_78: MicroController1.78 P1.10 | length 5.6
  Top Layer w0.254: 132.715,115.062 134.954,112.823 MicroController1.78
NetMicroController1_82: MicroController1.82 R28.1 U22.gndReceiver | length 6.1
  Top Layer w0.254: 132.149,112.972 134.299,110.823 MicroController1.82
NetMicroController1_83: MicroController1.83 R27.1 U21.gndReceiver | length 6.9
  Top Layer w0.254: 131.572,112.903 134.152,110.323 MicroController1.83
NetMicroController1_84: MicroController1.84 R16.1 U10.gndReceiver | length 7.1
  Top Layer w0.254: 131.318,112.395 131.369,112.344 131.392,112.344 133.913,109.823 MicroController1.84
NetMicroController1_85: MicroController1.85 R15.1 U9.gndReceiver | length 7.2
  Top Layer w0.254: 131.191,111.887 131.623,111.455 131.634,111.455 133.767,109.323 MicroController1.85
NetMicroController1_86: MicroController1.86 R14.1 U8.gndReceiver | length 6.8
  Top Layer w0.254: 131.445,110.998 133.62,108.823 MicroController1.86
NetMicroController1_87: MicroController1.87 R13.1 U7.gndReceiver | length 6.9
  Top Layer w0.254: 131.26,110.178 133.116,108.323 MicroController1.87
NetMicroController1_88: MicroController1.88 R12.1 U6.gndReceiver | length 7.3
  Top Layer w0.254: 130.937,109.855 132.969,107.823 MicroController1.88
NetMicroController1_96: MicroController1.96 P2.2 | length 7.1
  Top Layer w0.254: 130.683,102.87 131.636,103.823 MicroController1.96
NetMicroController1_97: MicroController1.97 P2.4 | length 7
  Top Layer w0.254: 130.937,101.981 132.279,103.323 MicroController1.97
NetR1_1: R1.1 R3.2 U1.3 | length 5
  Top Layer w0.8: U1.3 82.677,97.023 R1.1 ; R1.1@82.809,97.155 R3.2
NetR4_2: R4.2 U2.1 | length 3
  Top Layer w1: U2.1 73.787,84.886 R4.2
NetR5_1: R5.1 R6.2 U3.3 | length 5.2
  Top Layer w0.8: U3.3 R5.1@100.965,97.028 ; R5.1@101.092,97.155 R6.2
NetR7_1: R7.1 R8.2 U4.3 | length 3.6
  Top Layer w0.8: U4.3 63.373,110.993 R8.2 R7.1
NetR9_1: R9.1 U5.5
NetR17_2: R17.2 U11.1 U16.3
NetR18_2: R18.2 U12.1 U17.3
NetR19_2: R19.2 U13.1 U18.3
NetR20_2: R20.2 U14.1 U19.3
NetR21_2: R21.2 U15.1 U20.3
NetR22_2: R22.2 U11.2 U16.1
NetR23_2: R23.2 U12.2 U17.1
NetR24_2: R24.2 U13.2 U18.1
NetR25_2: R25.2 U14.2 U19.1
NetR26_2: R26.2 U15.2 U20.1
NetR29_2: R29.2 U23.1 U25.3
NetR30_2: R30.2 U24.1 U26.3
NetR31_2: R31.2 U23.2 U25.1
NetR32_2: R32.2 U24.2 U26.1
NetR35_1: R35.1 U37.30 | length 6.3
  Top Layer w0.254: R35.1 121.072,24.638 121.91,25.476 123.012,25.476 124.009,26.473 U37.30
NetR36_1: R36.1 U37.8 | length 11.4
  Top Layer w0.4: U37.8 130.556,39.24 R36.1
NetR37_1: R37.1 U37.9 | length 9.8
  Top Layer w0.4: U37.9 125.609,38.667 128.778,41.836 R37.1
NetR38_2: R38.2 U37.29 | length 10.8
  Top Layer w0.254: R38.2 121.844,23.8 119.878,23.8 119.685,23.993 119.685,25.283 120.335,25.933 122.453,25.933 123.209,26.689 U37.29
NetR45_2: "To wifi1.8" R45.2 R46.1
NetU6_gndEmitter: U6.gndEmitter U11.3
NetU7_gndEmitter: U7.gndEmitter U12.3
NetU8_gndEmitter: U8.gndEmitter U13.3
NetU9_gndEmitter: U9.gndEmitter U14.3
NetU10_gndEmitter: U10.gndEmitter U15.3
NetU21_gndEmitter: U21.gndEmitter U23.3
NetU22_gndEmitter: U22.gndEmitter U24.3
NetU27_dout: U27.dout U28.din
NetU28_dout: U28.dout U29.din
NetU29_dout: U29.dout U30.din
NetU30_dout: U30.dout U31.din
NetU32_dout: U32.dout U33.din
NetU33_dout: U33.dout U34.din
RESET: "ICSP uC1.5" C25.1 D12.1 MicroController1.30 R41.1 | length 27.8
  Top Layer w0.254: MicroController1.30 152.477,103.803 153.406,103.803 153.45,103.759 155.575,103.759 155.702,103.886 v1(156.083,103.886)
  Bottom Layer w0.254: v1@155.829,103.886 v1(156.083,103.886) ; v1@155.956,103.886 158.433,106.363 160.34,106.363 161.421,105.283 162.433,105.283 ; C25.1 159.385,94.833 D12.1 160.655,96.103 R41.1 162.115,99.123 162.88,99.123 163.513,99.756 163.513,103.314 162.433,104.394 162.433,105.279
"RESET 16": "ICSP 1.5" D13.1 R42.1 U37.24 | length 8.3
  Bottom Layer w0.5: 113.538,41.91 117.475,41.91 R42.1 119.67,42.037 D13.1
SCK: "ICSP uC1.3" MicroController1.20 | length 19.9
  Top Layer w0.254: v1(148.082,97.79) 148.407,98.115 MicroController1.20
  Bottom Layer w0.254: v1(148.082,97.79) 148.336,97.79 153.702,103.156 156.385,103.156 157.053,103.823 160.34,103.823 161.421,102.743 162.433,102.743
"SCK 16": "ICSP 1.3" U37.15 | length 9.1
  Top Layer w0.254: 115.697,38.481 115.824,38.735 116.311,38.248 120.26,38.248 120.614,37.894 120.614,37.288 U37.15
  Bottom Layer w0.254: 113.538,39.37 114.808,39.37 115.697,38.481 115.824,38.608 115.824,38.735
SELIAL_RX: MicroController1.2 R37.2 | length 57.1
  Top Layer w0.254: R37.2 128.778,49.276 129.921,50.419 129.921,65.532 139.407,75.018 MicroController1.2
SERIAL_TX: MicroController1.3 R36.2 | length 56.5
  Top Layer w0.254: R36.2 130.556,65.278 139.907,74.629 MicroController1.3
"SHDN 8V": R2.1 U1.4 U2.3 | length 13.6
  Top Layer w1: U2.3 71.771,88.027 72.898,89.154 v1(72.898,89.281) ; R2.1@75.946,96.266 v1(75.946,94.488) U1.4@77.442,94.488
  Bottom Layer w1: v1(72.898,89.281) 75.946,92.329 v1(75.946,94.488)
"VCC 3.3V": "To wifi1.3" "To wifi1.7" C6.1 C29.1 L3.2 R7.2 | length 37.7
  Top Layer w1: R7.2 65.532,114.046 v1(65.532,115.951) ; L3.2 84.565,113.157 v1(92.075,113.157)
  Bottom Layer w1: v1(65.532,115.951) 89.281,115.951 v1(92.075,113.157)
"VCC 5V": "Codeuse droite1.1" "Codeuse gauche1.1" "ICSP 1.2" "ICSP uC1.2" "To LED Matrix1.1" "To RJ1.4" "To Sound1.3" C4.1 C9.1 C10.1 C11.1 C12.1 C13.1 C14.1 C15.1 C16.1 C17.2 C20.1 C23.2 C26.1 C30.2 D2.1 D12.2 D13.2 LD2.A MicroController1.10 MicroController1.31 MicroController1.61 MicroController1.80 MicroController1.100 P1.1 P2.6 R5.2 R39.2 R40.2 R41.2 R42.2 U6.VCC U7.VCC U8.VCC U9.VCC U10.VCC U21.VCC U22.VCC U27.VCC U28.VCC U29.VCC U30.VCC U31.VCC U32.VCC U33.VCC U34.VCC U35.9 U37.4 U37.32 | length 45.8
  Top Layer w0.254: R40.2 R39.2 ; 132.715,100.457 134.081,101.823 MicroController1.100 ; 132.923,113.492 134.592,111.823 MicroController1.80 ; 141.593,97.421 143.407,99.234 MicroController1.10 ; MicroController1.61 145.907,119.364 147.828,121.285 ; MicroController1.31 153.961,104.323 156.165,106.528 162.179,106.528
  Top Layer w1: R5.2 100.838,102.489 D2.1 105.156,104.013 C4.1 LD2.A
"VCC 5V USB": C7.1 C19.2 LD1.A R4.1 U5.4 U36.1 U37.31 | length 113.9
  Top Layer w0.4: U5.4@70.866,78.491 C7.1 70.866,36.449 75.946,31.369 97.536,31.369 103.632,25.273 115.443,25.273 119.634,21.082 v1(119.634,20.828) ; U5.4 72.395,78.491 R4.1 ; U36.1 v1@119.878,20.828 ; v1(122.555,20.828) 122.809,20.828 124.809,22.828 U37.31
  Bottom Layer w0.4: v1(119.634,20.828) v1(122.555,20.828)
"VCC 8V": C2.1 C18.1 D1.1 D4.2 D5.2 D10.2 D11.2 R1.2 U35.8 | length 71.2
  Top Layer w1: R1.2 D1.1@82.677,103.886 ; D1.1 C2.1 v3(88.011,104.013) ; v3(100.076,81.661) 102.326,81.661 D4.2 ; D10.2 108.93,77.597 U35.8
  Bottom Layer w1: v3(88.011,104.013) 102.489,89.535 ; v3(100.076,81.661) 100.076,87.122 102.489,89.535 ; U35.8 111.054,82.367 111.054,82.644 110.203,83.495 108.529,83.495 102.489,89.535
pads on no net: "To wifi1.4" "To wifi1.5" "To wifi1.6" MicroController1.1 MicroController1.4 MicroController1.6 MicroController1.7 MicroController1.8 MicroController1.9 MicroController1.14 MicroController1.19 MicroController1.27 MicroController1.28 MicroController1.29 MicroController1.36 MicroController1.38 MicroController1.39 MicroController1.47 MicroController1.48 MicroController1.49 MicroController1.50 MicroController1.54 MicroController1.56 MicroController1.57 MicroController1.63 MicroController1.64 MicroController1.65 MicroController1.66 MicroController1.67 MicroController1.68 MicroController1.69 MicroController1.71 MicroController1.72 MicroController1.73 MicroController1.79 MicroController1.89 MicroController1.90 MicroController1.91 MicroController1.92 MicroController1.93 MicroController1.94 MicroController1.95 SW1.3 U31.dout U34.dout U36.4 U37.5 U37.6 U37.7 U37.12 U37.14 U37.18 U37.19 U37.20 U37.21 U37.22 U37.23 U37.25 U37.26
copper on no net: | length 19.2
  Top Layer w0.254: 129.159,102.997 130.485,104.323 137.357,104.323 ; 138.303,119.126 139.907,117.522 139.907,115.373 ; 152.457,112.323 154.487,112.323 157.353,115.189

## Keep-outs
Keep-Out Layer:
  rectangle: -14.537,175.257 270.463,180.257
  rectangle: 270.463,-14.743 275.463,180.257
  rectangle: -14.537,-19.743 275.463,-14.743
  rectangle: -19.537,-19.743 -14.537,180.257
Mechanical 1:
  circle w0.254: c120.835,59.229 r6.75
  lines w0.2: 150.749,83.274 150.749,33.274 166.749,33.274 166.749,83.274 ; 75.057,33.274 75.057,83.274 91.057,83.274 91.057,33.274 75.057,33.274
  lines w0.254: 189.833,83.116 cw(c120.835,82.55) 189.833,83.121

## Silkscreen, mask and mechanical layers (free items; w line width, h text height)
Mechanical 1:
  lines w0.2: 150.749,83.274 166.749,83.274

## Text inside footprints (layer, text, board x,y; h text height)
"To wifi1": Top Overlay "8" at 95.793,123.14 h1.27 r180; Top Overlay "7" at 95.793,125.68 h1.27 r180; Top Overlay "1" at 106.969,125.68 h1.27 r180; Top Overlay "2" at 107.477,123.14 h1.27 r180
U36: Top Overlay "End of PCB" at 117.602,13.97 h0.5